# Altium PCB Solar_Panel_v1.PcbDoc
Units mm, origin at the board's own origin, x right, y up, seen from the top; angles counter-clockwise.
Board outline 82.55 x 324.99 mm, 6 copper layers (Top Layer, Signal Layer 1, Signal Layer 2, Signal Layer 3, Signal Layer 4, Bottom Layer), stack 1.231 mm thick; 10 components, 9 nets, 45 pads, 10 vias.
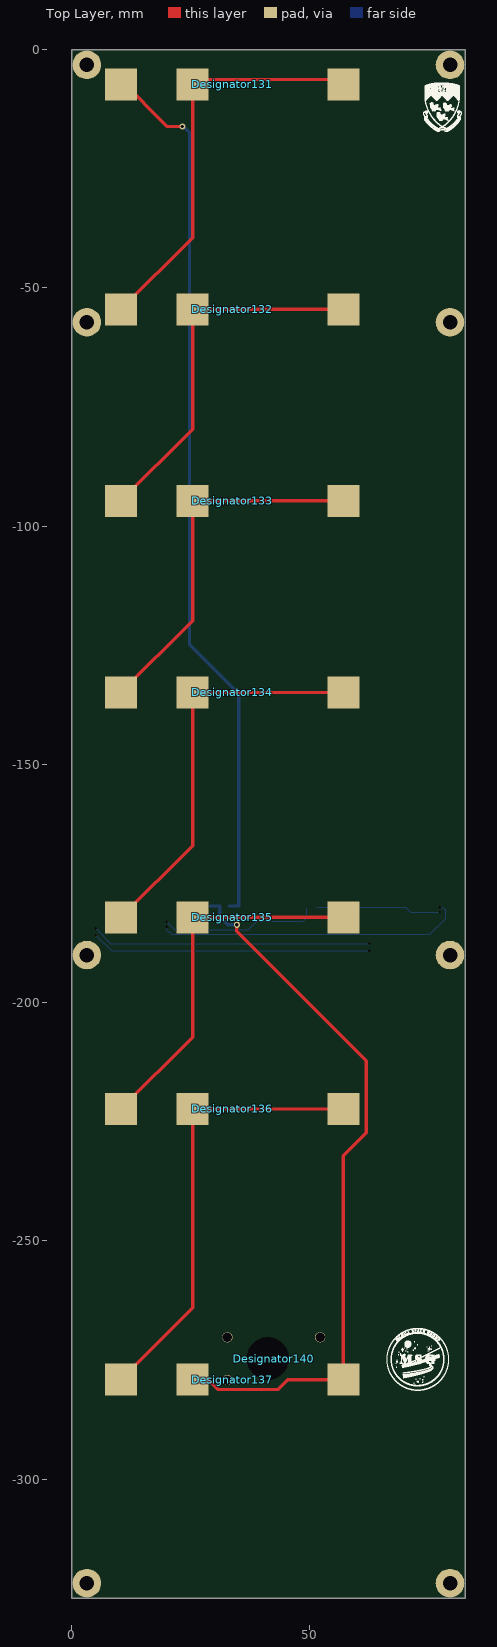
[diagram p0: Top Layer view]
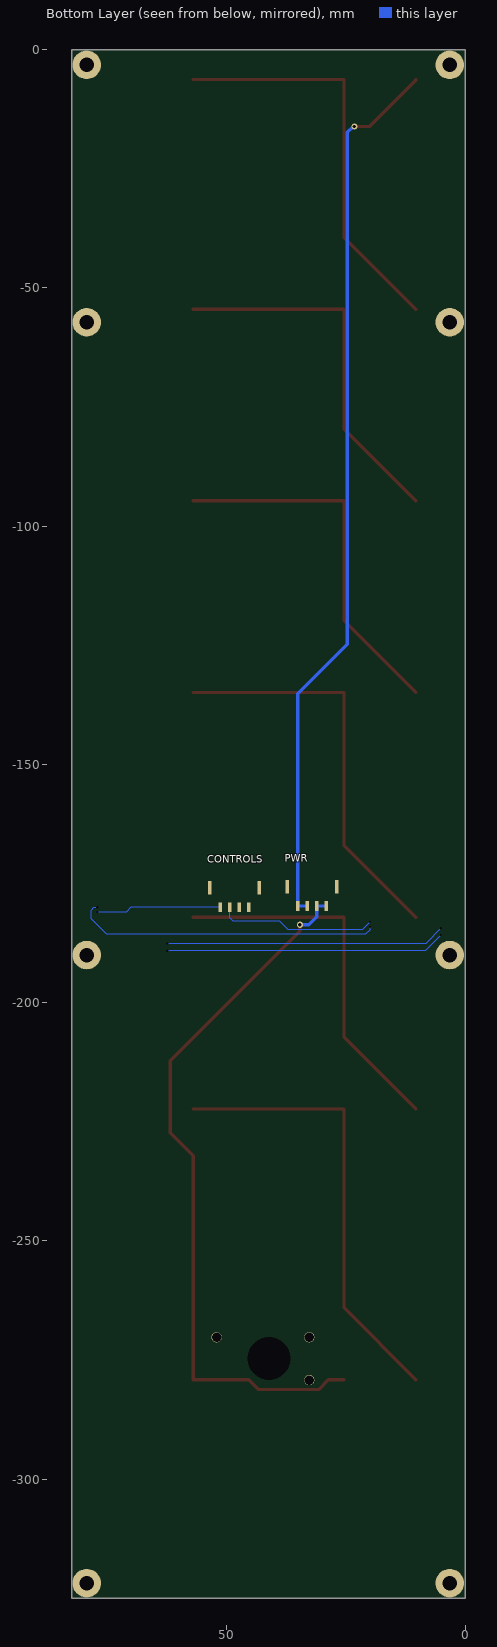
[diagram p1: Bottom Layer view, seen from below]
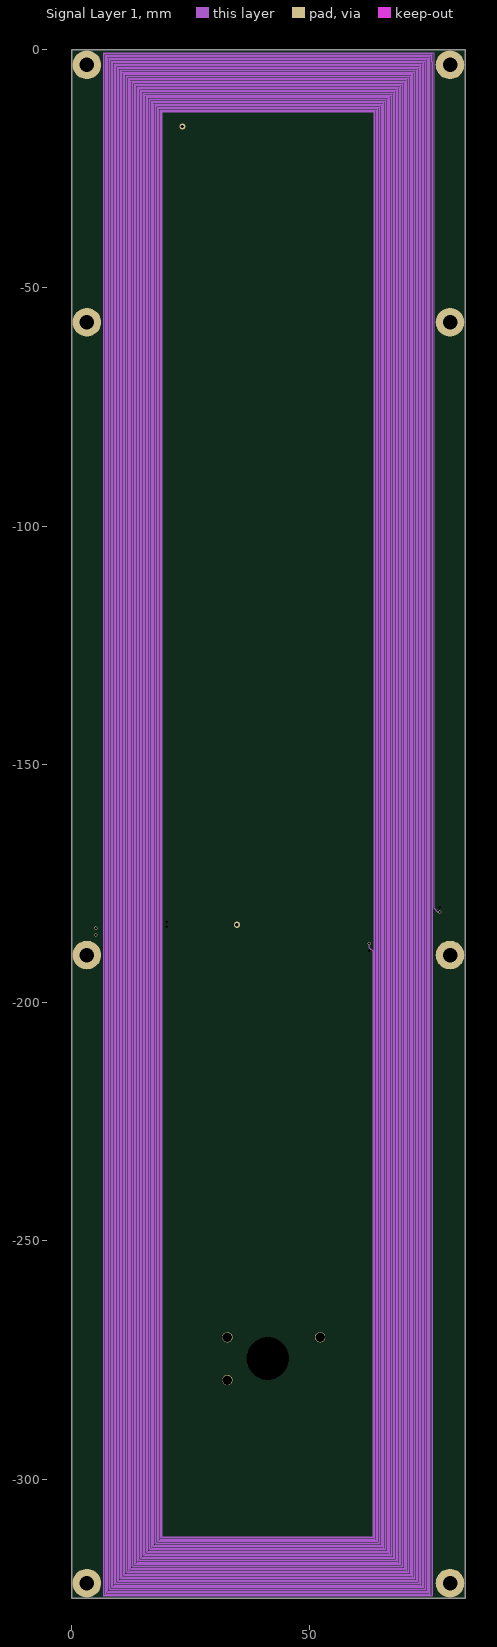
[diagram p2: Signal Layer 1]
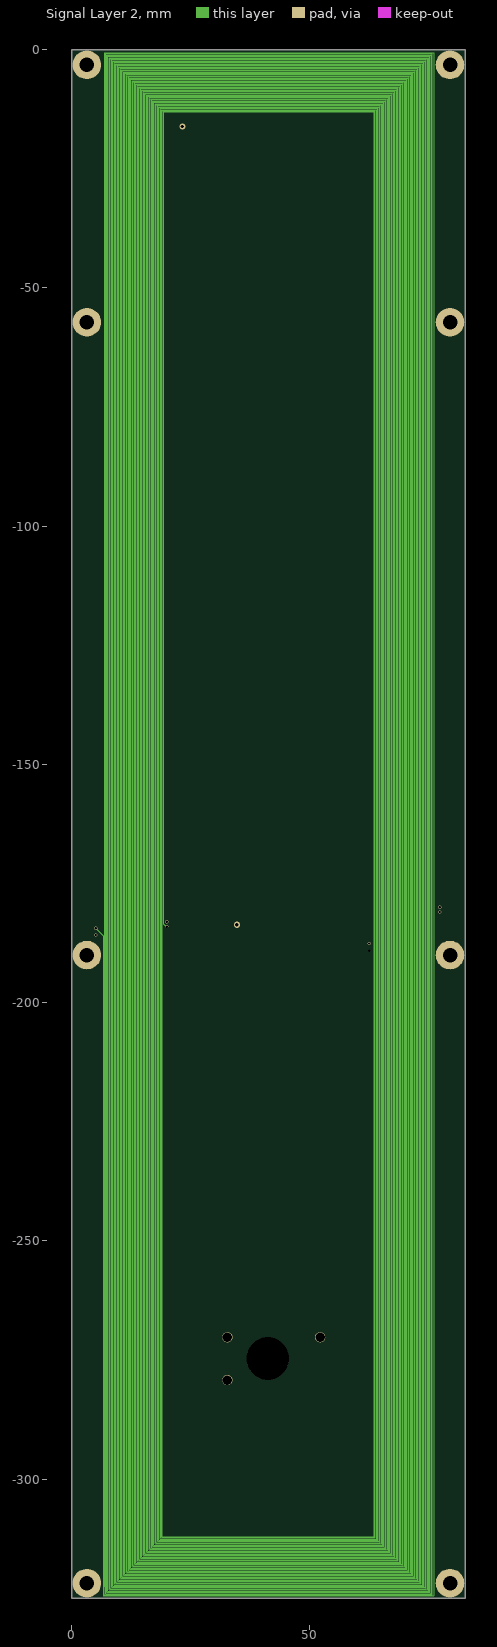
[diagram p3: Signal Layer 2]
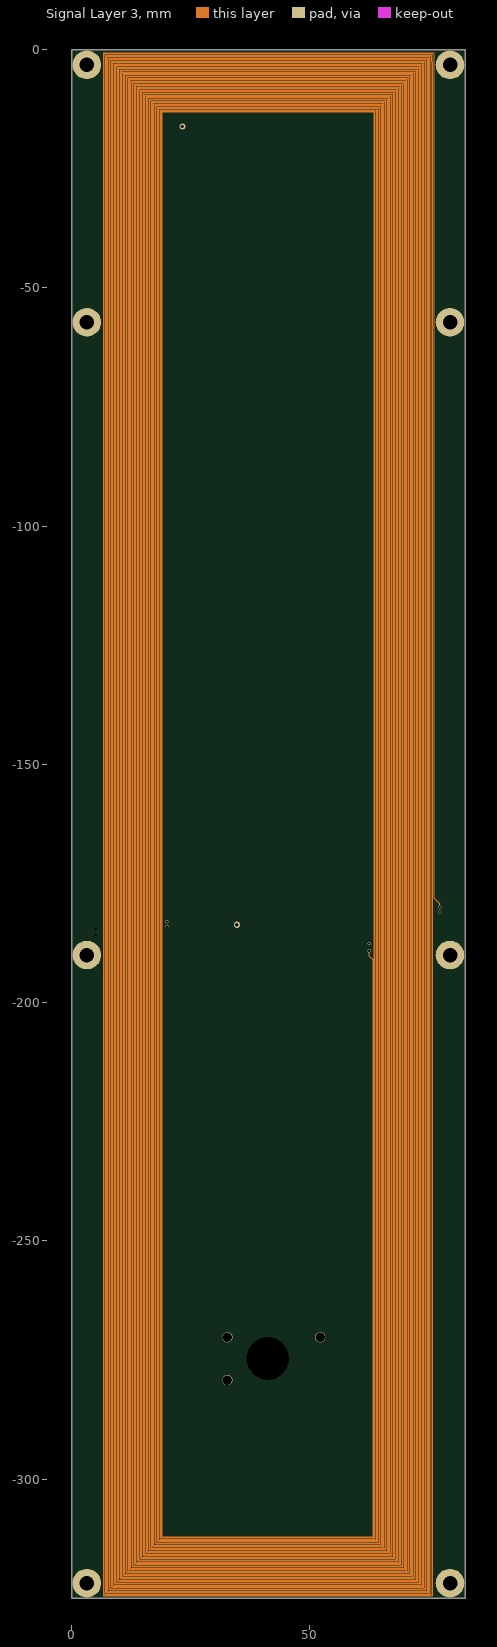
[diagram p4: Signal Layer 3]
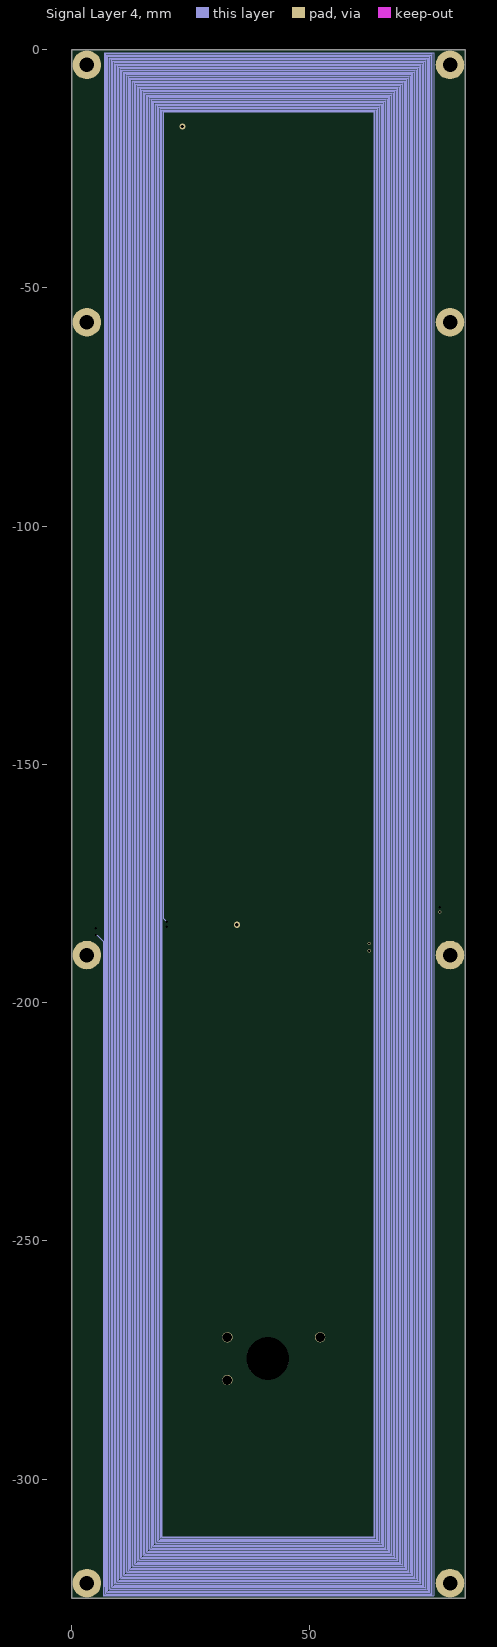
[diagram p5: Signal Layer 4]
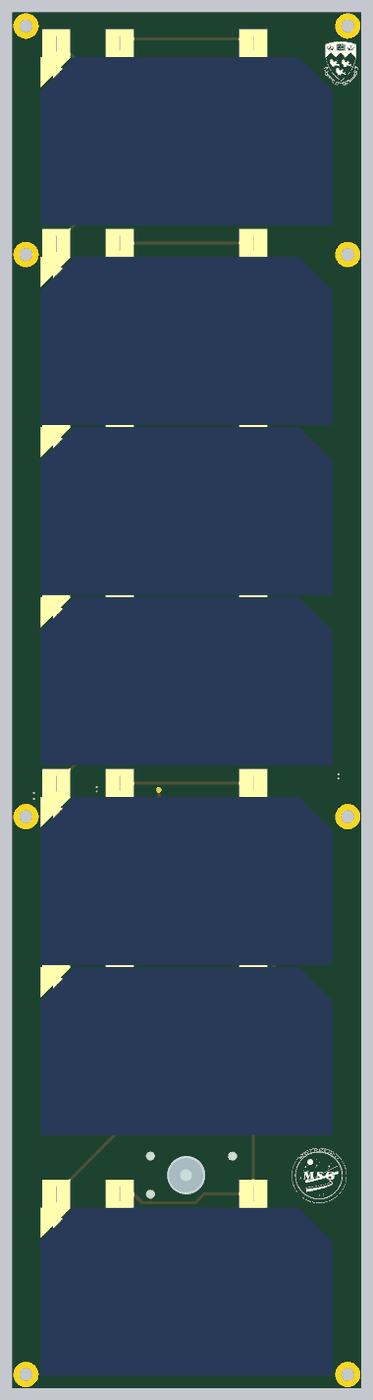
[diagram p6: 3D render of the assembled board from above, using the file's embedded part models]

## Layer stack, top to bottom
Top Solder: solder mask 0.0102, Solder Resist, Dk 3.5
Top Layer: signal copper 0.0356
Dielectric 1: core 0.254, FR-4, Dk 4.2
Signal Layer 1: signal copper 0.036
Dielectric 3: prepreg 0.127, Dk 4.2
Signal Layer 2: signal copper 0.036
Dielectric 4: core 0.254, Dk 4.2
Signal Layer 3: signal copper 0.036
Dielectric 5: prepreg 0.127, Dk 4.2
Signal Layer 4: signal copper 0.036
Dielectric 2: core 0.254, Dk 4.2
Bottom Layer: signal copper 0.0356
Bottom Solder: solder mask 0.0102, Solder Resist, Dk 3.5

## Board outline
0,-324.993 82.55,-324.993 82.55,0 0,0

## Design rules (kind name [scope] priority, off if disabled: settings)
Clearance [All] p1: gap=0.254 ignorepadtopadclearanceinfootprint=FALSE except(0: Arc-Hole Track-Hole SMDPad-Hole THPad-Hole Via-Hole Fill-Hole Poly-Hole Region-Hole Text-Hole)
ComponentClearance [All] p1 off: gap=0.254 collisioncheckmode=3 verticalgap=0.254 showdistances=FALSE
PolygonConnect [All] p1: connectstyle=Direct reliefconductorwidth=2 reliefentries=4 polygonreliefangle="90 Angle" airgapwidth=0.254
RoutingVias [All] p1: holewidth=0.711 width=1.27 viastyle="Through Hole" minholewidth=0.711 minwidth=1.27 maxholewidth=0.711 maxwidth=1.27
SolderMaskExpansion [All] p1: expansion=0.102
Width [All] p1: maxlimit=1 minlimit=0.1 preferedwidth=0.254 toplayer_minwidth=0.254 toplayer_prefwidth=0.7 midlayer1_maxwidth=0.254 midlayer2_maxwidth=0.254 midlayer3_maxwidth=0.254 midlayer4_maxwidth=0.254 bottomlayer_prefwidth=0.7 minimp=50.000000 maximp=50.000000 favimp=50.000000
29 further rules are at their usual default settings.

## Components (designator, comment, footprint, x,y, rotation, side; value= is the part's Value field where it differs from the comment)
CONTROLS "Comment" 4pinPwr 49.249,-184.785 r180 bottom
Designator131 "Comment" SOLAR_CELL 6.71,-7.287 r0 top
Designator132 "Comment" SOLAR_CELL 6.71,-54.491 r0 top
Designator133 "Comment" SOLAR_CELL 6.71,-94.691 r0 top
Designator134 "Comment" SOLAR_CELL 6.71,-134.891 r0 top
Designator135 "Comment" SOLAR_CELL 6.71,-182.091 r0 top
Designator136 "Comment" SOLAR_CELL 6.71,-222.291 r0 top
Designator137 "Comment" SOLAR_CELL 6.71,-279.098 r0 top
Designator140 "Comment" solarsensor 41.148,-274.701 r0 top
PWR "Comment" 4pinPwr 32.993,-184.531 r180 bottom

## Footprints (in the part's own frame and the unit in brackets; to place one, negate y for a bottom-side part, rotate by r counter-clockwise, add the part's x,y. Pads: shape width x height; smd on the part's side, far side on the other; paste and mask are expansions set on the pad)
4pinPwr [mm]
  rect 0.75x2 smd: 1(-2.1,4.826) 2(-0.1,4.826) 3(1.9,4.826) 4(3.9,4.826)
  rect 0.75x2.8 smd: ATT(-4.318,8.89) ATT(6.096,8.89)
  body extent -5.11,3.94 6.89,13.39, height 5.9
SOLAR_CELL [mm]
  rect 6.7x6.7 smd: 1(3.642,0) 2(18.686,0) 3(50.317,0)
  body extent -0.06,-42.98 69.07,3.28, height 0.1
solarsensor [mm]
  round 8.7 hole 9: 4(0,0)
  round 2.14 hole 2: 5(-8.47,-4.5) 5(-8.47,4.5) 5(11,4.5)
  body extent -17.6,-5.5 15.4,5.5

## Free pads (board coordinates)
  round 6 hole 3.05: 1(3.2,-321.8) 1(3.2,-190) 1(3.2,-57.2) 1(79.4,-321.8) 1(79.4,-190) 1(79.4,-57.2) 1(79.4,-3.2)
  round 6 hole 3.05 paste+0: 1(3.2,-3.2)

## Via types
v1: diameter 0/0/0.7/0.7/0/0 (per signal layer), hole 0.5, Top Layer to Bottom Layer, 3 vias
v2: diameter 0/0.7/0.7/0/0/0 (per signal layer), hole 0.5, Top Layer to Bottom Layer, 2 vias
v3: diameter 0/0.7/0.7/0.7/0.7/0 (per signal layer), hole 0.5, Top Layer to Bottom Layer, 2 vias
v4: diameter 1.27, hole 0.711, Top Layer to Bottom Layer, 2 vias
v5: diameter 0/0/0/0.7/0.7/0 (per signal layer), hole 0.5, Top Layer to Bottom Layer, 1 vias

## Nets (pads, with @x,y where several pads share a name; then routed paths per layer and width w, separated by ;. In a path a pad name is that pad's centre, name@x,y a point inside that pad or via, vN(x,y) a via of type N, cw(c..) or ccw(c..) an arc to the next point about the centre after c; other vN are vias at no path point)
12V: Designator131.1 PWR.1 PWR.2 | length 187.8
  Top Layer w0.7: Designator131.1@10.352,-6.271 10.273,-6.35 20.052,-16.129 v4(23.241,-16.129)
  Bottom Layer w0.7: v4(23.241,-16.129) 23.495,-16.129 24.714,-17.348 24.714,-124.816 35.093,-135.194 PWR.1 PWR.2
GND0: Designator137.2 Designator137.3 PWR.3 PWR.4 | length 150.6
  Top Layer w0.7: Designator137.2 28.654,-279.098 30.734,-281.178 43.259,-281.178 45.339,-279.098 Designator137.3 57.027,-232.152 61.849,-227.33 61.849,-212.217 34.671,-185.039 v4(34.671,-183.642)
  Bottom Layer w0.7: PWR.4 PWR.3 31.093,-181.969 32.766,-183.642 v4(34.671,-183.642)
MGT: CONTROLS.1 CONTROLS.2 | length 147495.4
  Signal Layer 1 w0.1: v3(62.484,-187.579) 62.484,-188.468 63.246,-189.23 63.246,-312.039 19.05,-312.039 19.05,-13.081 63.5,-13.081 63.5,-312.293 18.796,-312.293 18.796,-12.827 63.754,-12.827 63.754,-312.547 18.542,-312.547 18.542,-12.573 64.008,-12.573 64.008,-312.801 18.288,-312.801 18.288,-12.319 64.262,-12.319 64.262,-313.055 18.034,-313.055 18.034,-12.065 64.516,-12.065 64.516,-313.309 17.78,-313.309 17.78,-11.811 64.77,-11.811 64.77,-313.563 17.526,-313.563 17.526,-11.557 65.024,-11.557 65.024,-313.817 17.272,-313.817 17.272,-11.303 65.278,-11.303 65.278,-314.071 17.018,-314.071 17.018,-11.049 65.532,-11.049 65.532,-314.325 16.764,-314.325 16.764,-10.795 65.786,-10.795 65.786,-314.579 16.51,-314.579 16.51,-10.541 66.04,-10.541 66.04,-314.833 16.256,-314.833 16.256,-10.287 66.294,-10.287 66.294,-315.087 16.002,-315.087 16.002,-10.033 66.548,-10.033 66.548,-315.341 15.748,-315.341 15.748,-9.779 66.802,-9.779 66.802,-315.595 15.494,-315.595 15.494,-9.525 67.056,-9.525 67.056,-315.849 15.24,-315.849 15.24,-9.271 67.31,-9.271 67.31,-316.103 14.986,-316.103 14.986,-9.017 67.564,-9.017 67.564,-316.357 14.732,-316.357 14.732,-8.763 67.818,-8.763 67.818,-316.611 14.478,-316.611 14.478,-8.509 68.072,-8.509 68.072,-316.865 14.224,-316.865 14.224,-8.255 68.326,-8.255 68.326,-317.119 13.97,-317.119 13.97,-8.001 68.58,-8.001 68.58,-317.373 13.716,-317.373 13.716,-7.747 68.834,-7.747 68.834,-317.627 13.462,-317.627 13.462,-7.493 69.088,-7.493 69.088,-317.881 13.208,-317.881 13.208,-7.239 69.342,-7.239 69.342,-318.135 12.954,-318.135 12.954,-6.985 69.596,-6.985 69.596,-318.389 12.7,-318.389 12.7,-6.731 69.85,-6.731 69.85,-318.643 12.446,-318.643 12.446,-6.477 70.104,-6.477 70.104,-318.897 12.192,-318.897 12.192,-6.223 70.358,-6.223 70.358,-319.151 11.938,-319.151 11.938,-5.969 70.612,-5.969 70.612,-319.405 11.684,-319.405 11.684,-5.715 70.866,-5.715 70.866,-319.659 11.43,-319.659 11.43,-5.461 71.12,-5.461 71.12,-319.913 11.176,-319.913 11.176,-5.207 71.374,-5.207 71.374,-320.167 10.922,-320.167 10.922,-4.953 71.628,-4.953 71.628,-320.421 10.668,-320.421 10.668,-4.699 71.882,-4.699 71.882,-320.675 10.414,-320.675 10.414,-4.445 72.136,-4.445 72.136,-320.929 10.16,-320.929 10.16,-4.191 72.39,-4.191 72.39,-321.183 9.906,-321.183 9.906,-3.937 72.644,-3.937 72.644,-321.437 9.652,-321.437 9.652,-3.683 72.898,-3.683 72.898,-321.691 9.398,-321.691 9.398,-3.429 73.152,-3.429 73.152,-321.945 9.144,-321.945 9.144,-3.175 73.406,-3.175 73.406,-322.199 8.89,-322.199 8.89,-2.921 73.66,-2.921 73.66,-322.453 8.636,-322.453 8.636,-2.667 73.914,-2.667 73.914,-322.707 8.382,-322.707 8.382,-2.413 74.168,-2.413 74.168,-322.961 8.128,-322.961 8.128,-2.159 74.422,-2.159 74.422,-323.215 7.874,-323.215 7.874,-1.905 74.676,-1.905 74.676,-323.469 7.62,-323.469 7.62,-1.651 74.93,-1.651 74.93,-323.723 7.366,-323.723 7.366,-1.397 75.184,-1.397 75.184,-323.977 7.112,-323.977 7.112,-1.143 75.438,-1.143 75.438,-324.231 6.858,-324.231 6.858,-0.889 75.692,-0.889 75.692,-2.54 75.692,-175.641 75.692,-324.485 6.604,-324.485 6.604,-0.635 75.946,-0.635 75.946,-180.086 76.835,-180.975 v3(77.216,-180.975)
  Signal Layer 2 w0.1: v2(5.08,-184.404) 6.604,-185.928 6.604,-324.485 75.946,-324.485 75.946,-0.635 6.858,-0.635 6.858,-149.479 6.858,-322.58 6.858,-324.231 75.692,-324.231 75.692,-0.889 7.112,-0.889 7.112,-323.977 75.438,-323.977 75.438,-1.143 7.366,-1.143 7.366,-323.723 75.184,-323.723 75.184,-1.397 7.62,-1.397 7.62,-323.469 74.93,-323.469 74.93,-1.651 7.874,-1.651 7.874,-323.215 74.676,-323.215 74.676,-1.905 8.128,-1.905 8.128,-322.961 74.422,-322.961 74.422,-2.159 8.382,-2.159 8.382,-322.707 74.168,-322.707 74.168,-2.413 8.636,-2.413 8.636,-322.453 73.914,-322.453 73.914,-2.667 8.89,-2.667 8.89,-322.199 73.66,-322.199 73.66,-2.921 9.144,-2.921 9.144,-321.945 73.406,-321.945 73.406,-3.175 9.398,-3.175 9.398,-321.691 73.152,-321.691 73.152,-3.429 9.652,-3.429 9.652,-321.437 72.898,-321.437 72.898,-3.683 9.906,-3.683 9.906,-321.183 72.644,-321.183 72.644,-3.937 10.16,-3.937 10.16,-320.929 72.39,-320.929 72.39,-4.191 10.414,-4.191 10.414,-320.675 72.136,-320.675 72.136,-4.445 10.668,-4.445 10.668,-320.421 71.882,-320.421 71.882,-4.699 10.922,-4.699 10.922,-320.167 71.628,-320.167 71.628,-4.953 11.176,-4.953 11.176,-319.913 71.374,-319.913 71.374,-5.207 11.43,-5.207 11.43,-319.659 71.12,-319.659 71.12,-5.461 11.684,-5.461 11.684,-319.405 70.866,-319.405 70.866,-5.715 11.938,-5.715 11.938,-319.151 70.612,-319.151 70.612,-5.969 12.192,-5.969 12.192,-318.897 70.358,-318.897 70.358,-6.223 12.446,-6.223 12.446,-318.643 70.104,-318.643 70.104,-6.477 12.7,-6.477 12.7,-318.389 69.85,-318.389 69.85,-6.731 12.954,-6.731 12.954,-318.135 69.596,-318.135 69.596,-6.985 13.208,-6.985 13.208,-317.881 69.342,-317.881 69.342,-7.239 13.462,-7.239 13.462,-317.627 69.088,-317.627 69.088,-7.493 13.716,-7.493 13.716,-317.373 68.834,-317.373 68.834,-7.747 13.97,-7.747 13.97,-317.119 68.58,-317.119 68.58,-8.001 14.224,-8.001 14.224,-316.865 68.326,-316.865 68.326,-8.255 14.478,-8.255 14.478,-316.611 68.072,-316.611 68.072,-8.509 14.732,-8.509 14.732,-316.357 67.818,-316.357 67.818,-8.763 14.986,-8.763 14.986,-316.103 67.564,-316.103 67.564,-9.017 15.24,-9.017 15.24,-315.849 67.31,-315.849 67.31,-9.271 15.494,-9.271 15.494,-315.595 67.056,-315.595 67.056,-9.525 15.748,-9.525 15.748,-315.341 66.802,-315.341 66.802,-9.779 16.002,-9.779 16.002,-315.087 66.548,-315.087 66.548,-10.033 16.256,-10.033 16.256,-314.833 66.294,-314.833 66.294,-10.287 16.51,-10.287 16.51,-314.579 66.04,-314.579 66.04,-10.541 16.764,-10.541 16.764,-314.325 65.786,-314.325 65.786,-10.795 17.018,-10.795 17.018,-314.071 65.532,-314.071 65.532,-11.049 17.272,-11.049 17.272,-313.817 65.278,-313.817 65.278,-11.303 17.526,-11.303 17.526,-313.563 65.024,-313.563 65.024,-11.557 17.78,-11.557 17.78,-313.309 64.77,-313.309 64.77,-11.811 18.034,-11.811 18.034,-313.055 64.516,-313.055 64.516,-12.065 18.288,-12.065 18.288,-312.801 64.262,-312.801 64.262,-12.319 18.542,-12.319 18.542,-312.547 64.008,-312.547 64.008,-12.573 18.796,-12.573 18.796,-312.293 63.754,-312.293 63.754,-12.827 19.05,-12.827 19.05,-312.039 63.5,-312.039 63.5,-13.081 19.304,-13.081 19.304,-183.515 v1@19.812,-184.023
  Signal Layer 3 w0.1: v5(62.484,-189.103) 62.484,-190.246 63.246,-191.008 63.246,-312.039 19.05,-312.039 19.05,-13.081 63.5,-13.081 63.5,-312.293 18.796,-312.293 18.796,-12.827 63.754,-12.827 63.754,-312.547 18.542,-312.547 18.542,-12.573 64.008,-12.573 64.008,-312.801 18.288,-312.801 18.288,-12.319 64.262,-12.319 64.262,-313.055 18.034,-313.055 18.034,-12.065 64.516,-12.065 64.516,-313.309 17.78,-313.309 17.78,-11.811 64.77,-11.811 64.77,-313.563 17.526,-313.563 17.526,-11.557 65.024,-11.557 65.024,-313.817 17.272,-313.817 17.272,-11.303 65.278,-11.303 65.278,-314.071 17.018,-314.071 17.018,-11.049 65.532,-11.049 65.532,-314.325 16.764,-314.325 16.764,-10.795 65.786,-10.795 65.786,-314.579 16.51,-314.579 16.51,-10.541 66.04,-10.541 66.04,-314.833 16.256,-314.833 16.256,-10.287 66.294,-10.287 66.294,-315.087 16.002,-315.087 16.002,-10.033 66.548,-10.033 66.548,-315.341 15.748,-315.341 15.748,-9.779 66.802,-9.779 66.802,-315.595 15.494,-315.595 15.494,-9.525 67.056,-9.525 67.056,-315.849 15.24,-315.849 15.24,-9.271 67.31,-9.271 67.31,-316.103 14.986,-316.103 14.986,-9.017 67.564,-9.017 67.564,-316.357 14.732,-316.357 14.732,-8.763 67.818,-8.763 67.818,-316.611 14.478,-316.611 14.478,-8.509 68.072,-8.509 68.072,-316.865 14.224,-316.865 14.224,-8.255 68.326,-8.255 68.326,-317.119 13.97,-317.119 13.97,-8.001 68.58,-8.001 68.58,-317.373 13.716,-317.373 13.716,-7.747 68.834,-7.747 68.834,-317.627 13.462,-317.627 13.462,-7.493 69.088,-7.493 69.088,-317.881 13.208,-317.881 13.208,-7.239 69.342,-7.239 69.342,-318.135 12.954,-318.135 12.954,-6.985 69.596,-6.985 69.596,-318.389 12.7,-318.389 12.7,-6.731 69.85,-6.731 69.85,-318.643 12.446,-318.643 12.446,-6.477 70.104,-6.477 70.104,-318.897 12.192,-318.897 12.192,-6.223 70.358,-6.223 70.358,-319.151 11.938,-319.151 11.938,-5.969 70.612,-5.969 70.612,-319.405 11.684,-319.405 11.684,-5.715 70.866,-5.715 70.866,-319.659 11.43,-319.659 11.43,-5.461 71.12,-5.461 71.12,-319.913 11.176,-319.913 11.176,-5.207 71.374,-5.207 71.374,-320.167 10.922,-320.167 10.922,-4.953 71.628,-4.953 71.628,-320.421 10.668,-320.421 10.668,-4.699 71.882,-4.699 71.882,-320.675 10.414,-320.675 10.414,-4.445 72.136,-4.445 72.136,-320.929 10.16,-320.929 10.16,-4.191 72.39,-4.191 72.39,-321.183 9.906,-321.183 9.906,-3.937 72.644,-3.937 72.644,-321.437 9.652,-321.437 9.652,-3.683 72.898,-3.683 72.898,-321.691 9.398,-321.691 9.398,-3.429 73.152,-3.429 73.152,-321.945 9.144,-321.945 9.144,-3.175 73.406,-3.175 73.406,-322.199 8.89,-322.199 8.89,-2.921 73.66,-2.921 73.66,-322.453 8.636,-322.453 8.636,-2.667 73.914,-2.667 73.914,-322.707 8.382,-322.707 8.382,-2.413 74.168,-2.413 74.168,-322.961 8.128,-322.961 8.128,-2.159 74.422,-2.159 74.422,-323.215 7.874,-323.215 7.874,-1.905 74.676,-1.905 74.676,-323.469 7.62,-323.469 7.62,-1.651 74.93,-1.651 74.93,-323.723 7.366,-323.723 7.366,-1.397 75.184,-1.397 75.184,-323.977 7.112,-323.977 7.112,-1.143 75.438,-1.143 75.438,-324.231 6.858,-324.231 6.858,-0.889 75.692,-0.889 75.692,-2.54 75.692,-175.641 75.692,-324.485 6.604,-324.485 6.604,-0.635 75.946,-0.635 75.946,-177.927 77.216,-179.197 v1(77.216,-179.959)
  Signal Layer 4 w0.1: v2(5.08,-185.801) 5.334,-185.801 6.604,-187.071 6.604,-324.485 75.946,-324.485 75.946,-0.635 6.858,-0.635 6.858,-149.479 6.858,-322.58 6.858,-324.231 75.692,-324.231 75.692,-0.889 7.112,-0.889 7.112,-323.977 75.438,-323.977 75.438,-1.143 7.366,-1.143 7.366,-323.723 75.184,-323.723 75.184,-1.397 7.62,-1.397 7.62,-323.469 74.93,-323.469 74.93,-1.651 7.874,-1.651 7.874,-323.215 74.676,-323.215 74.676,-1.905 8.128,-1.905 8.128,-322.961 74.422,-322.961 74.422,-2.159 8.382,-2.159 8.382,-322.707 74.168,-322.707 74.168,-2.413 8.636,-2.413 8.636,-322.453 73.914,-322.453 73.914,-2.667 8.89,-2.667 8.89,-322.199 73.66,-322.199 73.66,-2.921 9.144,-2.921 9.144,-321.945 73.406,-321.945 73.406,-3.175 9.398,-3.175 9.398,-321.691 73.152,-321.691 73.152,-3.429 9.652,-3.429 9.652,-321.437 72.898,-321.437 72.898,-3.683 9.906,-3.683 9.906,-321.183 72.644,-321.183 72.644,-3.937 10.16,-3.937 10.16,-320.929 72.39,-320.929 72.39,-4.191 10.414,-4.191 10.414,-320.675 72.136,-320.675 72.136,-4.445 10.668,-4.445 10.668,-320.421 71.882,-320.421 71.882,-4.699 10.922,-4.699 10.922,-320.167 71.628,-320.167 71.628,-4.953 11.176,-4.953 11.176,-319.913 71.374,-319.913 71.374,-5.207 11.43,-5.207 11.43,-319.659 71.12,-319.659 71.12,-5.461 11.684,-5.461 11.684,-319.405 70.866,-319.405 70.866,-5.715 11.938,-5.715 11.938,-319.151 70.612,-319.151 70.612,-5.969 12.192,-5.969 12.192,-318.897 70.358,-318.897 70.358,-6.223 12.446,-6.223 12.446,-318.643 70.104,-318.643 70.104,-6.477 12.7,-6.477 12.7,-318.389 69.85,-318.389 69.85,-6.731 12.954,-6.731 12.954,-318.135 69.596,-318.135 69.596,-6.985 13.208,-6.985 13.208,-317.881 69.342,-317.881 69.342,-7.239 13.462,-7.239 13.462,-317.627 69.088,-317.627 69.088,-7.493 13.716,-7.493 13.716,-317.373 68.834,-317.373 68.834,-7.747 13.97,-7.747 13.97,-317.119 68.58,-317.119 68.58,-8.001 14.224,-8.001 14.224,-316.865 68.326,-316.865 68.326,-8.255 14.478,-8.255 14.478,-316.611 68.072,-316.611 68.072,-8.509 14.732,-8.509 14.732,-316.357 67.818,-316.357 67.818,-8.763 14.986,-8.763 14.986,-316.103 67.564,-316.103 67.564,-9.017 15.24,-9.017 15.24,-315.849 67.31,-315.849 67.31,-9.271 15.494,-9.271 15.494,-315.595 67.056,-315.595 67.056,-9.525 15.748,-9.525 15.748,-315.341 66.802,-315.341 66.802,-9.779 16.002,-9.779 16.002,-315.087 66.548,-315.087 66.548,-10.033 16.256,-10.033 16.256,-314.833 66.294,-314.833 66.294,-10.287 16.51,-10.287 16.51,-314.579 66.04,-314.579 66.04,-10.541 16.764,-10.541 16.764,-314.325 65.786,-314.325 65.786,-10.795 17.018,-10.795 17.018,-314.071 65.532,-314.071 65.532,-11.049 17.272,-11.049 17.272,-313.817 65.278,-313.817 65.278,-11.303 17.526,-11.303 17.526,-313.563 65.024,-313.563 65.024,-11.557 17.78,-11.557 17.78,-313.309 64.77,-313.309 64.77,-11.811 18.034,-11.811 18.034,-313.055 64.516,-313.055 64.516,-12.065 18.288,-12.065 18.288,-312.801 64.262,-312.801 64.262,-12.319 18.542,-12.319 18.542,-312.547 64.008,-312.547 64.008,-12.573 18.796,-12.573 18.796,-312.293 63.754,-312.293 63.754,-12.827 19.05,-12.827 19.05,-312.039 63.5,-312.039 63.5,-13.081 19.304,-13.081 19.304,-182.372 v1(19.939,-183.007)
  Bottom Layer w0.1: v2(5.08,-185.801) 8.382,-189.103 v5(62.484,-189.103) ; v2(5.08,-184.404) 8.255,-187.579 v3(62.484,-187.579) ; v1(19.939,-184.023) 19.939,-184.658 20.955,-185.674 75.184,-185.674 78.486,-182.372 78.486,-180.594 77.978,-180.086 77.47,-180.086 77.216,-179.832 v1(77.216,-179.959) ; v1(19.939,-183.007) 21.59,-184.658 37.084,-184.658 38.862,-182.88 48.641,-182.88 49.349,-182.172 CONTROLS.2@49.349,-180.213 ; CONTROLS.1 70.104,-179.959 71.12,-180.975 v3(77.216,-180.975)
V1: Designator136.2 Designator136.3 Designator137.1 | length 94.7
  Top Layer w0.7: Designator137.1 25.396,-264.054 Designator136.2 Designator136.3
V2: Designator135.2 Designator135.3 Designator136.1 | length 78.1
  Top Layer w0.7: Designator136.1 25.396,-207.247 Designator135.2 Designator135.3
V3: Designator134.2 Designator134.3 Designator135.1 | length 85.1
  Top Layer w0.7: Designator135.1 25.396,-167.047 Designator134.2 Designator134.3
V4: Designator133.2 Designator133.3 Designator134.1 | length 78.1
  Top Layer w0.7: Designator134.1 25.396,-119.847 Designator133.2 Designator133.3
V5: Designator132.2 Designator132.3 Designator133.1 | length 78.1
  Top Layer w0.7: Designator133.1 25.396,-79.647 Designator132.2 Designator132.3
V6: Designator131.2 Designator131.3 Designator132.1 | length 86.1
  Top Layer w0.7: Designator132.1 25.396,-39.447 25.396,-6.271 Designator131.3@57.027,-6.271
pads on no net: CONTROLS.3 CONTROLS.4 CONTROLS.ATT Designator140.4 Designator140.5 PWR.ATT

## Other copper
Top Layer:
  pour cut-out: 40.132,-262.128

## Silkscreen, mask and mechanical layers (free items; w line width, h text height)
Top Overlay:
  drawing of 11516 lines, arcs and shapes, not listed